# Altium PCB Integrate.PcbDoc
Units mil, origin at the board's own origin, x right, y up, seen from the top; angles counter-clockwise.
Board outline 2690 x 1650 mil, 2 copper layers (Top Layer, Bottom Layer); 41 components, 23 nets, 151 pads, 406 vias.
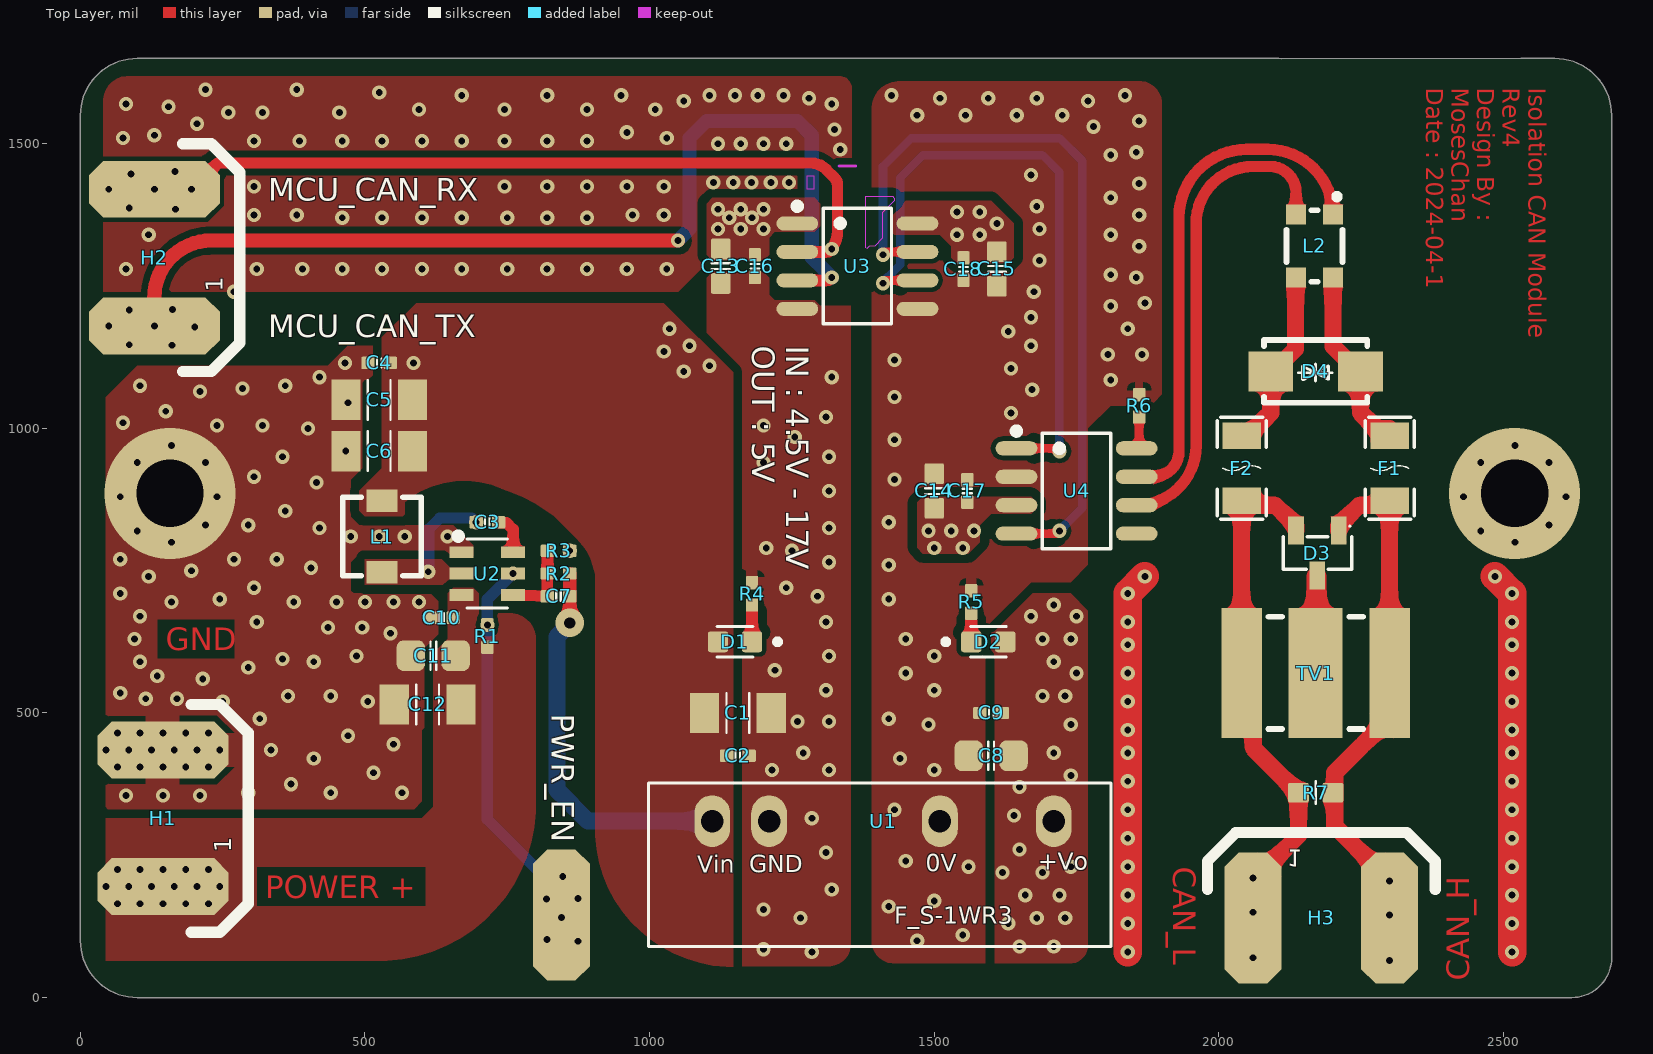
[diagram p0: Top Layer view]
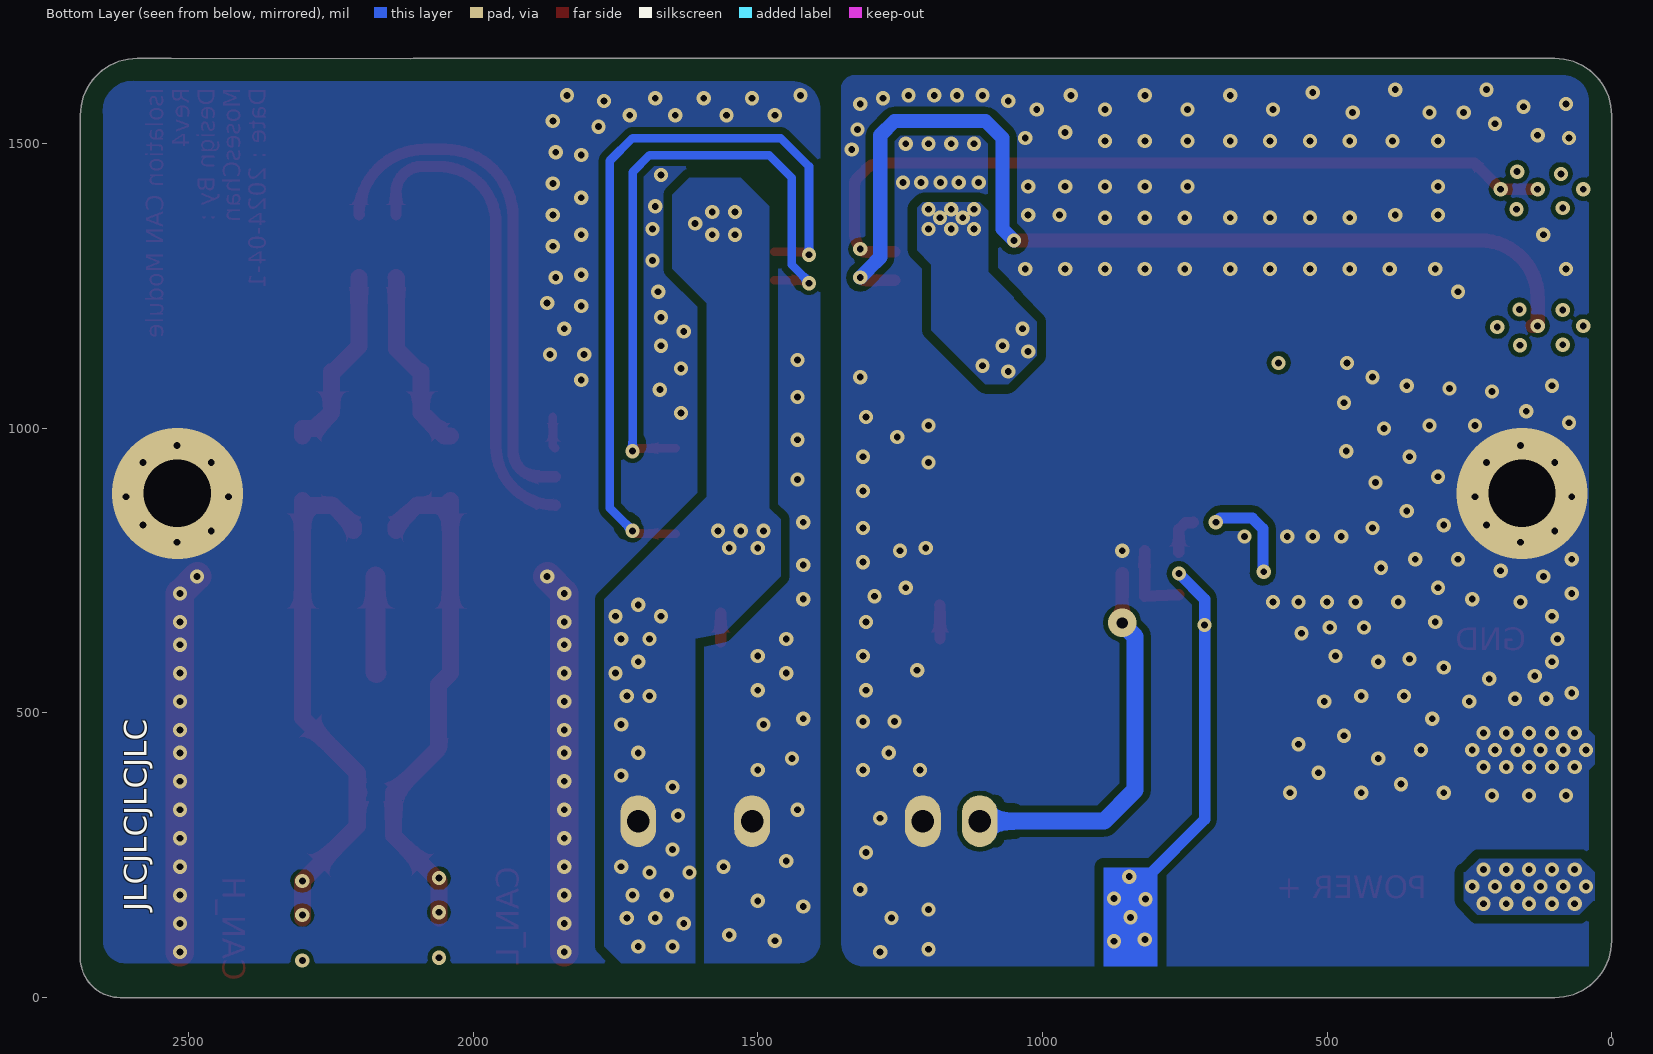
[diagram p1: Bottom Layer view, seen from below]
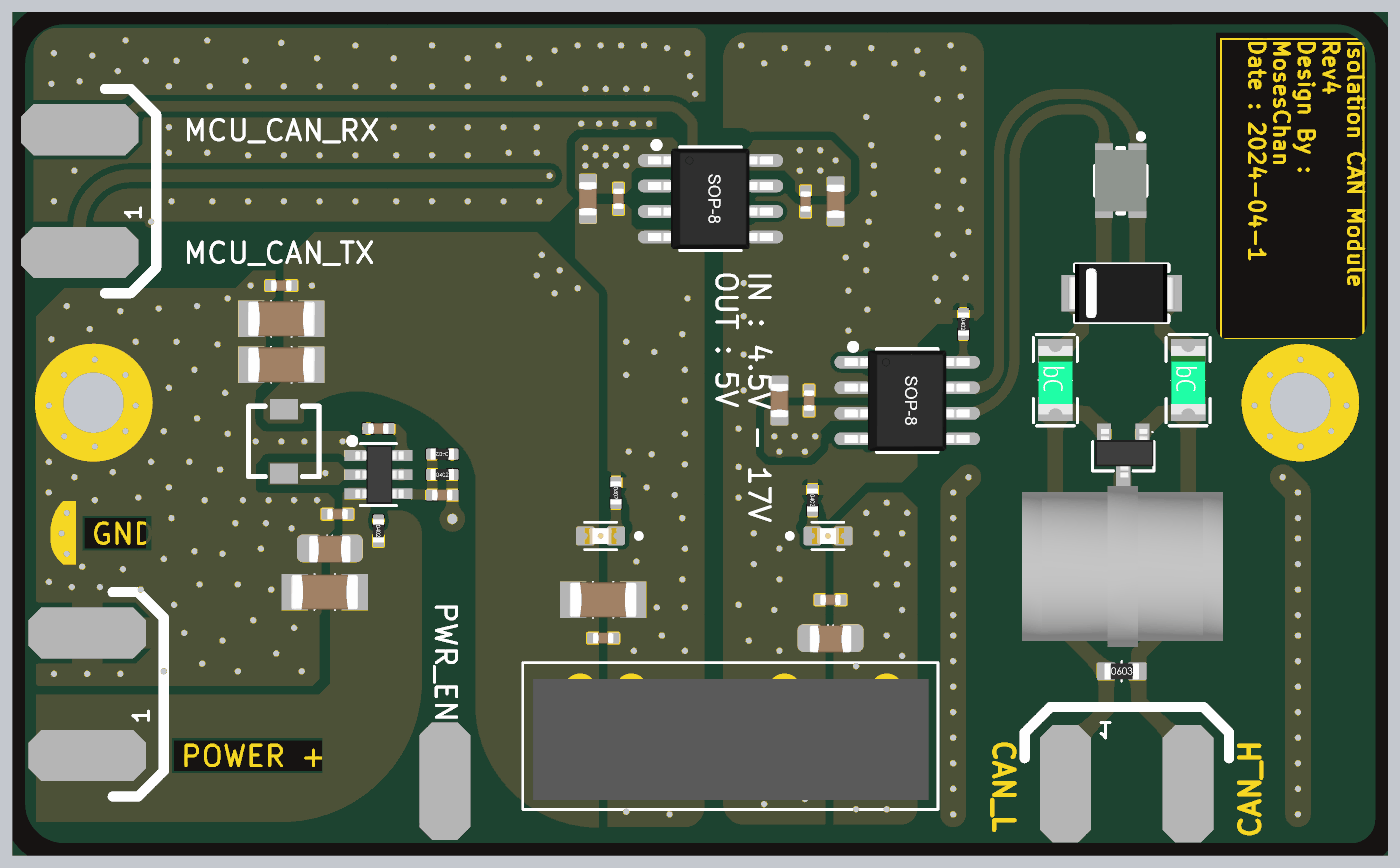
[diagram p2: 3D render of the assembled board from above, using the file's embedded part models]

## Layer stack, top to bottom
Top Solder: solder mask 0.4, Solder Resist, Dk 3.5
Top Layer: signal copper 1.4
Dielectric 1: dielectric 12.6, FR-4, Dk 4.8
Bottom Layer: signal copper 1.4
Bottom Solder: solder mask 0.4, Solder Resist, Dk 3.5

## Board outline
2620,0 ccw(c2620,70) 2690,70 2690,1550 ccw(c2590,1550) 2590,1650 2530,1650 2109.95,1649.5 ccw(c2100.02,1550.39) 2100,1650 100,1650 ccw(c100,1550) 0,1550 0,100 ccw(c100,100) 100,0

## Design rules (kind name [scope] priority, off if disabled: settings)
BoardOutlineClearance BoardOutlineClearance_1 [IsPad] p1: gap=0 ignorepadtopadclearanceinfootprint=FALSE
BoardOutlineClearance [All] p2: gap=10 ignorepadtopadclearanceinfootprint=FALSE
Clearance [All] p1: gap=8 ignorepadtopadclearanceinfootprint=FALSE except(5: SMDPad-SMDPad; 10: Arc-Via Arc-Hole Track-Via Track-Hole; 12: Arc-Fill Arc-Poly Arc-Region Track-Fill Track-Poly Track-Region; 13: Arc-THPad Track-THPad; 16: Fill-Fill Fill-Poly Fill-Region Poly-Poly Poly-Region Region-Region; 20: THPad-THPad)
ComponentClearance [All] p1: gap=0 collisioncheckmode=3 verticalgap=10 showdistances=TRUE
DiffPairsRouting [All] p1: maxlimit=10 minlimit=10 mostfreqgap=10 toplayer_minwidth=15 toplayer_maxwidth=15 toplayer_prefwidth=15 bottomlayer_minwidth=15 bottomlayer_maxwidth=15 bottomlayer_prefwidth=15 substack1={57F5FA3C-B000-454A-A462-912CA57F869F} toplayer_{57f5fa3c-b000-454a-a462-912ca57f869f}_minwidth=15 toplayer_{57f5fa3c-b000-454a-a462-912ca57f869f}_maxwidth=15 toplayer_{57f5fa3c-b000-454a-a462-912ca57f869f}_prefwidth=15 bottomlayer_{57f5fa3c-b000-454a-a462-912ca57f869f}_minwidth=15 bottomlayer_{57f5fa3c-b000-454a-a462-912ca57f869f}_maxwidth=15 bottomlayer_{57f5fa3c-b000-454a-a462-912ca57f869f}_prefwidth=15 maxuncoupledlength=500
Height [All] p1: minheight=0 maxheight=39330.71 prefheight=500
HoleSize [All] p1: absolutevalues=TRUE maxlimit=3897.64 minlimit=7.87 maxpercent=80.000 minpercent=20.000
HoleToHoleClearance [All] p1: gap=20 allowstackedmicrovias=TRUE
MinimumSolderMaskSliver [All] p1: minsoldermaskwidth=0
PlaneClearance [All] p1: clearance=7.87
PlaneConnect [All] p1: planeconnectstyle=Direct reliefexpansion=7.87 reliefentries=4 reliefconductorwidth=7.87 reliefairgap=7.87
PolygonConnect [All] p1: connectstyle=Direct reliefconductorwidth=10 reliefentries=4 polygonreliefangle="90 Angle" airgapwidth=10
RoutingVias [All] p1: holewidth=8 width=20 viastyle="Through Hole" minholewidth=8 minwidth=20 maxholewidth=1200 maxwidth=2400
SilkToSilkClearance [All] p1: silktosilkclearance=0.39
SilkToSolderMaskClearance [IsPad] p1: minsilkscreentomaskgap=0 clearancetoexposedcopper=TRUE
SolderMaskExpansion [All] p1: expansion=0.39 istentingtop=FALSE
Width [All] p1: maxlimit=3897.64 minlimit=8 preferedwidth=8 substack1={57F5FA3C-B000-454A-A462-912CA57F869F} minimp=50.000000 maximp=50.000000 favimp=50.000000
20 further rules are at their usual default settings.

## Components (designator, comment, footprint, x,y, rotation, side; value= is the part's Value field where it differs from the comment)
C1 "47uF" 1206_C 1155,500 r180 top
C2 "0.1uF" 0402_C 1155,425 r0 top
C3 "0.1uF" 0402_C 715,835 r0 top
C4 "4.7uF" 0402_C 525,1115 r0 top
C5 "47uF" 1206_C 525,1050 r0 top
C6 "47uF" 1206_C 525,960 r0 top
C7 "47nF" 0402_C 840,705 r0 top
C8 "22uF" 0805_C 1600,425 r180 top
C9 "0.1uF" 0402_C 1600,500 r0 top
C10 "0.1uF" 0402_C 635,667.5 r180 top
C11 "22uF" 0805_C 620,600.78 r180 top
C12 "47uF" 1206_C 610,515 r180 top
C13 "10uF" 0603_C 1125,1285 r90 top
C14 "10uF" 0603_C 1500,890 r270 top
C15 "10uF" 0603_C 1610,1280 r90 top
C16 "0.1uF" 0402_C 1185,1285 r90 top
C17 "0.1uF" 0402_C 1558.06,890 r270 top
C18 "0.1uF" 0402_C 1551.34,1279.68 r90 top
D1 "LED_RED" 0603_LED 1150,625 r180 top
D2 "LED_YELLOW" 0603_LED 1595,625 r0 top
D3 "SM712" SOT-23-3 2173,781 r90 top
D4 "Bi-TVS" SMA-BI 2170,1100 r0 top
F1 "JK 60V 0.1A" F1206 2300,930 r270 top
F2 "JK 60V 0.1A" F1206 2040.08,930 r270 top
H1 "Power Input" CONNECT_PAD 145,315 r90 top locked
H2 "CAN Input" CONNECT_PAD 130,1300 r90 top
H3 "CAN Output" CONNECT_PAD 2180,140 r0 top
L1 "3.3uH" IND-SMD_L3.5-W3.2 530,810 r270 top
L2 "PSCIAQ3225" FILTER-SMD_4P 2168.08,1320.44 r270 top
R1 "10K" 0402_R 715,635 r270 top
R2 "54.9K" 0402_R 840,745 r0 top
R3 "10K" 0402_R 840,785 r180 top
R4 "510R" 0402_R 1180,709.37 r270 top
R5 "510R" 0402_R 1565,695 r270 top
R6 "0R" 0402_R 1860,1039.68 r270 top
R7 "120R" 0603_R 2170,360 r0 top
TV1 "3RL090M-5-S (GDT)" DIO-DT-SMD 2170,570 r180 top
U1 "F0505S-1WR3" F_S-1WR3 1410,310 r0 top
U2 "TPS563201" SOT-23-6 715,745 r270 top
U3 "ADUM1201ARZ-RL7" SOP-8 1365,1285 r270 top
U4 "PCA82C251T" SOP-8 1750,890 r270 top

## Footprints (in the part's own frame and the unit in brackets; to place one, negate y for a bottom-side part, rotate by r counter-clockwise, add the part's x,y. Pads: shape width x height; smd on the part's side, far side on the other; paste and mask are expansions set on the pad)
0402_C [mm]
  rrect20% 0.6x0.55 smd mask+0.051: 1(-0.5,0) 2(0.5,0)
  silkscreen extent -0.1,-0.2 0.1,0.2, body extent -0.52,-0.27 0.53,0.28, height 0.52
0402_R [mm]
  rrect20% 0.6x0.55 smd mask+0.051: 1(-0.5,0) 2(0.5,0)
  body extent -0.58,-0.27 0.57,0.28, height 0.41
0603_C [mm]
  rrect20% 0.93x0.88 smd: 1(-0.77,0) 2(0.77,0)
  silkscreen extent -0.12,-0.4 0.13,0.4, body extent -0.85,-0.45 0.85,0.45, height 0.9
0603_LED [mm]
  rrect25% 0.91x0.93 smd: A(0.76,0) C(-0.76,0)
  silkscreen extent -2.02,-0.68 0.8,0.68, body extent -0.8,-0.4 0.8,0.4, height 0.55
0603_R [mm]
  rrect20% 0.93x0.88 smd: 1(-0.77,0) 2(0.77,0)
  silkscreen extent 0,-0.51 0,0.51, body extent -0.85,-0.4 0.85,0.4, height 0.56
0805_C [mil]
  rrect50% 50x54 smd: 1(-39.37,0) 2(39.37,0)
  silkscreen extent -5,-25 5,25, body extent -41,-25 41,28, height 37
1206_C [mm]
  rect 1.3x1.8 smd: 1(-1.49,0) 2(1.49,0)
  silkscreen extent -0.51,-0.89 0.51,0.89, body extent -1.67,-0.87 1.68,0.88, height 1.4
CONNECT_PAD [mil]
  oct 100x230 smd mask+0.39: 1(-120,0) 2(120,0)
  oct 100x230 on Top Solder: 1(-120,0) 2(120,0)
  silkscreen extent -200,-150 200,-50
DIO-DT-SMD [mm]
  rect 1.8x5.8 smd mask+0.01: 1(-3.3,0) 3(3.3,0)
  rect 1.8x5.8 on Top Solder: 1(-3.3,0) 3(3.3,0)
  rect 2.4x5.8 smd mask+0.01: 2(0,0)
  rect 2.4x5.8 on Top Solder: 2(0,0)
  silkscreen extent -2.13,-2.51 2.11,2.49, body extent -5.05,-3.87 4.95,4.13, height 8.06
F1206 [mm]
  rect 1.19x1.728 smd mask+0.01: 1(-1.445,0) 2(1.445,0)
  rect 1.19x1.728 on Top Solder: 1(-1.445,0) 2(1.445,0)
  silkscreen extent -2.27,-1.09 2.27,1.09, body extent -1.7,-0.84 1.7,0.86, height 0.71
F_S-1WR3 [mm]
  oval 1.6x2.3 hole 1: 1(-7.62,0) 2(-5.08,0) 5(2.54,0) 7(7.62,0)
  silkscreen extent -10.47,-5.6 10.17,1.7, body extent -9.95,-5.12 9.7,0.88, height 10.16
FILTER-SMD_4P [mm]
  rect 0.9x0.9 smd mask+0.01: 1(-1.4,0.825) 2(-1.4,-0.825) 3(1.4,-0.825) 4(1.4,0.825)
  rect 0.9x0.9 on Top Solder: 1(-1.4,0.825) 2(-1.4,-0.825) 3(1.4,-0.825) 4(1.4,0.825)
  silkscreen extent -2.33,-1.25 1.6,1.25, body extent -1.52,-1.27 1.52,1.27, height 2.74
IND-SMD_L3.5-W3.2 [mm]
  rect 1x1.4 smd mask+0.01: 1(-1.6,0) 2(1.6,0)
  rect 1x1.4 on Top Solder: 1(-1.6,0) 2(1.6,0)
  silkscreen extent -1.75,-1.75 1.75,1.75
SMA-BI [mm]
  rect 2x1.8 smd mask+0.01: 1(-2,0) 2(2,0)
  rect 2x1.8 on Top Solder: 1(-1.968,0) 2(2,0)
  silkscreen extent -2.3,-1.4 2.3,1.4, body extent -2.67,-1.46 2.61,1.46, height 2.41
SOP-8 [mm]
  oval 0.63x1.865 smd mask+0.01: 1(-1.905,-2.682) 2(-0.635,-2.682) 3(0.635,-2.682) 4(1.905,-2.682) 5(1.905,2.682) 6(0.635,2.682) 7(-0.635,2.682) 8(-1.905,2.682)
  oval 0.63x1.865 on Top Solder: 1(-1.905,-2.682) 2(-0.635,-2.682) 3(0.635,-2.682) 4(1.905,-2.682) 5(1.905,2.682) 6(0.635,2.682) 7(-0.635,2.682) 8(-1.905,2.682)
  silkscreen extent -2.82,-2.83 2.58,1.52, body extent -2.5,-3.11 2.5,3.11, height 1.87
SOT-23-3 [mm]
  rect 1.25x0.7 on Top Solder: 1(0.991,-0.94) 2(0.991,0.94) 3(-1.016,0)
  rect 1.25x0.7 smd mask+0.01: 1(1,-0.95) 2(1,0.95) 3(-1,0)
  silkscreen extent -0.73,-1.53 1.26,1.53, body extent -1.05,-1.5 1.35,1.4, height 1
SOT-23-6 [mil]
  rect 20.95x42.2 smd mask+0.39: 1(-37.4,-45.24) 2(0,-45.24) 3(37.4,-45.24) 4(37.4,45.24) 5(0,45.24) 6(-37.4,45.24)
  rect 20.95x42.2 on Top Solder: 1(-37,-46) 2(0.4,-46) 3(38,-45) 4(37.8,45) 5(0.4,45) 6(-37,45)
  silkscreen extent -72,-57 61,35, body extent -57,-45 57,49, height 39

## Part data
C1 C5 C6 C12: library part C1206, "SMT Capacitor"
C2 C3 C4 C7 C9 C10 C16 C17 C18: library part C0402, "SMT Capacitor"
C8 C11: library part C0805, "SMT Capacitor"
C13 C14 C15: library part C0603, "SMT Capacitor"
D1 D2: library part LED_0603, "CHIP LED WHITE 0603 TOP VIEW", Package=None, Availability=Unavailable, MP=LTW-C191TLA, Price=None
D3: "Dual channel ESD discharger", JLCPCB Part Class="Extended Part", Manufacturer="TECH PUBLIC(??)", Add into BOM=yes, Convert to PCB=yes, Datasheet=https://atta.szlcsc.com/upload/public/pdf/source/20210810/E76C7C1824B0CB2A5B8963B3ABCE2DCE.pdf, Device=SM712_C521963, LCSC Part Name=SM712, Manufacturer Part=SM712, Name=SM712, Supplier=LCSC, Supplier Footprint=SOT-23, Supplier Part=C521963, Symbol=SM712_C521963
D4: library part SMAJ13CA, "Bidirectional TVS", Breakdown Voltage=14.4V, JLCPCB Part Class="Extended Part", LCSC Part Name="?? Vrwm:13V", Manufacturer=Slkor(???), Maximum Clamping Voltage=21.5V, Peak Pulse Current (Ipp)@10/1000µs=18.6A, Reverse Stand-Off Voltage (Vrwm)=13V, Add into BOM=yes, Convert to PCB=yes, Datasheet=https://atta.szlcsc.com/upload/public/pdf/source/20200414/C513473_E63E0FD439519C3FF443B186760FCA0C.pdf, Device=SMAJ13CA_C513473, Manufacturer Part=SMAJ13CA, Name=SMAJ13CA, polarity=??, Supplier=LCSC, Supplier Footprint=SMA, Supplier Part=C513473, Symbol=SMAJ13CA_C513473
F1 F2: library part JK-nSMD010/60V, "Resettable Fuse", JLCPCB Part Class="Extended Part", LCSC Part Name="100mA 60V", Manufacturer=JK(??), Add into BOM=yes, Convert to PCB=yes, Datasheet=https://atta.szlcsc.com/upload/public/pdf/source/20210427/C2830251_B9511B640A50AD6A91174E2DDDD254CA.pdf, Device=JK-nSMD010/60V, Manufacturer Part=JK-nSMD010/60V, Name=JK-nSMD010/60V, Supplier=LCSC, Supplier Footprint=SMD1206, Supplier Part=C2830236, Symbol=JK-NSMD010/60V
H1 H2 H3: library part Connector-2, "Two pin connector."
L1: library part TMPC0302H-3R3MG, "SMD power inductor 3.3uH", DC Resistance (DCR)=125mO, JLCPCB Part Class="Extended Part", LCSC Part Name="3.3uH ±20% 3A 125mO", Manufacturer=TAI-TECH(??), Rated Current=3A, Tolerance=±20%, Add into BOM=yes, Convert to PCB=yes, Datasheet=https://atta.szlcsc.com/upload/public/pdf/source/20200917/C305200_025B938FDDD8216CB9AF20170083C431.pdf, Device=TMPC0302H-3R3MG, Manufacturer Part=TMPC0302H-3R3MG, Name=3.3uH, Supplier=LCSC, Supplier Footprint=SMD, Supplier Part=C305200, Symbol=TMPC0302H-3R3MG
L2: library part PSCIAQ3225-101Z, "Common mode choke - 5.1KOhm @ 10Mhz", Current rating=150mA, DC Resistance (DCR)=1.5O, Impedance @ Frequency=5.1kO@10MHz, Inductance @ Frequency=100uH@100kHz, JLCPCB Part Class="Extended Part", LCSC Part Name="?? 1210????? ??5.1kO@10MHz", Manufacturer=PROD(???), Operating Temperature=-25?~+105?, Voltage Rating=80VAC, Voltage Rating - DC=80V, Add into BOM=yes, Convert to PCB=yes, Datasheet=https://atta.szlcsc.com/upload/public/pdf/source/20221209/0F115E7BC87283E32C2A7BCB65AC9CDC.pdf, Device=PSCIAQ3225-101Z, Manufacturer Part=PSCIAQ3225-101Z, Name=PSCIAQ3225-101Z, Number of Lines=2, Supplier=LCSC, Supplier Footprint=1210, Supplier Part=C3011568, Symbol=PSCIAQ3225-101Z, Withstanding Voltage=80V
R1 R2 R3 R4 R5 R6: library part R0402, "SMT Resistor"
R7: library part R0603, "SMT Resistor"
TV1: library part 3RL090M-5-S, "Gas Discharge Tube", DC Spark-over Voltage=90V, JLCPCB Part Class="Extended Part", LCSC Part Name="90V 5kA 3???GDT", Manufacturer=Brightking(????), Maximum Capacitance @ 1MHz=2pF, Nominal Impulse Discharge Current=5kA, Tolerance=±20%, Add into BOM=yes, Convert to PCB=yes, Datasheet=https://atta.szlcsc.com/upload/public/pdf/source/20160709/1468031850741.pdf, Device=3RL090M-5-S, Manufacturer Part=3RL090M-5-S, Name=3RL090M-5-S, Number of Poles=3, Supplier=LCSC, Supplier Footprint=SMD,5x6.6mm, Supplier Part=C78322, Symbol=3RL090M-5-S
U1: "MORNSUN Isolation Power supply"
U2: "DCDC In 4.5V~17V Out 768mV~7V 3A", Input Voltage=4.5V~17V, JLCPCB Part Class="Extended Part", LCSC Part Name="??? Vin=4.5V~17V Vout=768mV~7V 3A", Manufacturer=TI(????), Manufacturer Part=TPS563201DDCR, Operating Temperature=-40?~+125?@(TJ), Output Current (Max)=3A, Output Voltage=768mV~7V, Switching Frequency=580kHz, Add into BOM=yes, Convert to PCB=yes, Datasheet=https://atta.szlcsc.com/upload/public/pdf/source/20170707/1499421477081.pdf, Device=TPS563201DDCR, Function=???, Name=TPS563201DDCR, Number of Outputs=1, Output Type=??, Supplier=LCSC, Supplier Footprint=SOT-23-Thin-6, Supplier Part=C116592, Symbol=TPS563201DDCR, Synchronous Rectification=?, Topology=???
U3: library part ADUM1201ARZ, "Digital Isolator", Isolation voltage=2500Vrms, JLCPCB Part Class="Basic Part", Manufacturer=ADI(???)/LINEAR(??), Operating Temperature=-55?~+100?, Supply Voltage=2.7V~5.5V, Voltage Isolation or Not=?????, Add into BOM=yes, Applications=??, Convert to PCB=yes, Data Rate=1Mbps, Datasheet=https://atta.szlcsc.com/upload/public/pdf/source/20121103/1457706544769.pdf, Device=ADUM1201ARZ-RL7, Forward Channel=1, Isolation Technology=???, LCSC Part Name=ADUM1201ARZ-RL7, Manufacturer Part=ADUM1201ARZ-RL7, Name=ADUM1201ARZ-RL7, number of channels=2, Reverse channel=1, Supplier=LCSC, Supplier Footprint=SOIC-8, Supplier Part=C9669, Symbol=ADUM1201ARZ-RL7
U4: library part PCA82C251, "CAN transceiver", Manufacturer=Tokmas(????), Add into BOM=yes, Convert to PCB=yes, Datasheet=https://atta.szlcsc.com/upload/public/pdf/source/20230625/276DDB82A8AA19CE4785C79DB2491288.pdf, Device=PCA82C251T, LCSC Part Name=PCA82C251T, link=https://atta.szlcsc.com/upload/public/pdf/source/20230621/1484E0AD24B83654AF18D5B601DFC963.pdf, Manufacturer Part=PCA82C251T, Name=PCA82C251T, Supplier=LCSC, Supplier Footprint=SOP-8, Supplier Part=C7432796, Symbol=PCA82C251T

## Free pads (board coordinates)
  oct 100x230 smd: 11(845,145)

## Via types
v1: diameter 25, hole 12, Top Layer to Bottom Layer, tented both sides, 304 vias
v2: diameter 25, hole 12, Top Layer to Bottom Layer, tented bottom, 53 vias
v3: diameter 25, hole 12, Top Layer to Bottom Layer, 46 vias
v4: diameter 230, hole 118.11, Top Layer to Bottom Layer, 2 vias
v5: diameter 50, hole 20, Top Layer to Bottom Layer, tented top, 1 vias

## Nets (pads, with @x,y where several pads share a name; then routed paths per layer and width w, separated by ;. In a path a pad name is that pad's centre, name@x,y a point inside that pad or via, vN(x,y) a via of type N, cw(c..) or ccw(c..) an arc to the next point about the centre after c; other vN are vias at no path point)
BS: C3.2 U2.6@760.24,782.4 | length 70.8
  Top Layer w20: C3.2 735.51,834.17 748.52,834.17 760.24,822.46 U2.6@760.24,782.4
CAN_GND: C8.2 C9.1 C14.1 C15.1 C17.1 C18.1 R5.1 R6.1 U1.5 U3.5@1470.61,1210 U4.2@1644.39,915 | length 1344.9
  Top Layer w50: v1(1840,80) v2(1840,710) v1(1870,740) ; v1(2485,740) v2(2515,710) v1(2515,80)
  other v1: 1470,100 1550,110 1420,160 1500,170 1840,180 2515,180 1560,230 1450,240 1840,280 2515,280 1430,330 1840,380 2515,380 1500,400 1440,420 1840,470 2515,470 1490,480 1420,490 1500,540 1450,570 1840,570 2515,570 1450,630 1840,660 2515,660 1420,700 1420,760 1420,835 1430,910 1430,980 1635,1027 1430,1055 1672,1068 1635,1105 1430,1120 1805,1130 1865,1130 1670,1145 1630,1170 1840,1175 1670,1195 1810,1215 1870,1220 1675,1240 1855,1265 1810,1270 1685,1295 1860,1320 1810,1340 1685,1350 1860,1375 1680,1390 1810,1405 1860,1430 1670,1445 1810,1480 1855,1485 1780,1530 1860,1540 1470,1550 1555,1550 1645,1550 1725,1550 1770,1575 1510,1580 1595,1580 1680,1580 1425,1585 1835,1585
  other v2: 1840,130 2515,130 1840,230 2515,230 1840,330 2515,330 1840,430 2515,430 1840,520 2515,520 1500,600 1840,620 2515,620 1810,1085
  other v3: 2520,800 2460,820 2580,830 2430,880 2610,880 2460,940 2580,940 2520,970
  other v4: 2519.69,885.83
EN: pad.11 R1.1 U2.5@760.24,745 | length 624.9
  Bottom Layer w20: v1(760.24,745) 715,699.76 v1(715,654.68) 715,313 815.5,212.5 v1(847.5,212.5)
  other v1: 874,99 820,102 845,141 819,173 874,174
EXT_CAN_H: D3.1@2210.4,820.37 F1.2@2300,873.11 H3.2@2300,140 R7.2 TV1.1@2299.92,570 | length 932.1
  Top Layer w30: R7.2 R7.2@2201.3,360 ; D3.1@2210.4,820.37 2210.4,828.76 2246.33,864.68 2291.57,864.68 2299.96,873.07 2299.96,570.04 2299.92,570 2299.92,491.26 2203.62,394.96 2203.62,362.32 R7.2@2201.3,360 ; H3.2@2300,140 v2(2300,205) 2203.62,301.38 2203.62,357.68 R7.2@2201.3,360
  other v2: 2300,65 2300,145
EXT_CAN_L: D3.2@2135.6,820.37 F2.2@2040.08,873.11 H3.1@2060,140 R7.1 TV1.3@2040.08,570 | length 930.5
  Top Layer w30: H3.1@2060,140 2060,205 2140,285 2140,359.69 R7.1 2138.7,360 2060.51,438.19 2060.51,549.57 2040.08,570 2040.08,873.11 2048.51,864.68 2099.67,864.68 2135.6,828.76 D3.2@2135.6,820.37
  other v2: 2060,70 2060,150 2060,210
FB: C7.1 R2.1 R3.2 U2.4@760.24,707.6 | length 140.1
  Top Layer w20: U2.4@760.24,707.6 C7.1 R2.1 R3.2
GND: C1.1 C2.2 C4.1 C5.1 C6.1 C10.2 C11.2 C12.2 C13.1 C16.1 H1.2@145,435 R3.1 R4.1 U1.2 U2.1@669.76,782.4 U3.4@1259.39,1210
  other v1: 1285,80 1200,85 1265,140 1200,155 1320,190 1310,255 1285,315 80,355 145,355 210,355 295,360 440,360 565,360 370,375 515,395 1215,400 1315,400 410,420 1270,430 335,435 550,445 470,460 1260,485 1315,485 315,490 250,520 505,520 115,525 170,525 365,530 440,530 70,535 1310,540 215,560 135,565 1220,575 295,580 105,590 410,590 355,595 485,600 1315,600 95,630 545,640 435,650 495,650 310,660 1310,660 105,670 160,695 375,695 450,695 500,695 550,695 595,695 245,700 1295,705 70,710 305,720 1240,720 120,740 195,750 405,755 1315,765 70,770 270,770 345,770 859.69,785 1250,785 1205,790 475,810 525,810 570,810 645,810 420,825 1315,825 295,830 360,855 1315,890 415,905 305,915 1200,940 355,950 1315,950 466.34,960 1255,985 400,1000 240,1005 320,1005 1200,1005 75,1010 1310,1020 150,1030 470,1045 210,1065 285,1070 105,1075 360,1075 420,1090 1320,1090 270,1240 80,1280 310,1280 390,1280 460,1280 530,1280 600,1280 670,1280 750,1280 820,1280 890,1280 960,1280 1030,1280 120,1340 460,1370 530,1370 600,1370 670,1370 750,1370 820,1370 890,1370 305,1375 380,1375 970,1375 1025,1375 305,1425 745,1425 820,1425 890,1425 960,1425 1025,1425 1112,1432 1147,1432 1179,1432 1213,1432 1245,1432 1335,1490 1120,1500 1160,1500 1200,1500 1240,1500 305,1505 385,1505 460,1505 530,1505 600,1505 670,1505 745,1505 820,1505 890,1505 75,1510 1030,1510 130,1515 960,1520 1325,1525 205,1535 260,1555 320,1555 455,1555 595,1560 745,1560 890,1560 1010,1560 155,1565 80,1570 1320,1570 1060,1575 1280,1580 670,1585 820,1585 950,1585 1105,1585 1150,1585 1190,1585 1235,1585 525,1590 220,1595 380,1595
  other v2: 160,800 100,820 220,830 70,880 240,880 100,940 220,940 160,970 465,1115
  other v3: 65,405 105,405 145,405 185,405 225,405 45,435 85,435 125,435 165,435 205,435 245,435 65,465 105,465 145,465 185,465 225,465
  other v4: 157.48,885.83
INNER_CAN_H: L2.1@2200.56,1375.56 U4.7@1855.61,915 | length 915.7
  Top Layer w20: U4.7@1855.61,915 1885,915 ccw(c1885,960) 1930,960 1930,1371.01 cw(c2048.99,1371.01) 2048.99,1490 2086.12,1490 cw(c2086.12,1375.56) 2200.56,1375.56 L2.1@2200,1376.12
INNER_CAN_L: L2.2@2135.6,1375.56 U4.6@1855.61,865 | length 852.1
  Top Layer w20: U4.6@1855.61,865 ccw(c1855.61,969.39) 1960,969.39 1960,1360 cw(c2060,1360) 2060,1460 2090,1460 cw(c2090,1414.4) 2135.6,1414.4 L2.2@2135.6,1375.56
ISO_VCC_5V: C8.1 C9.2 C14.2 C15.2 C17.2 C18.2 D2.A U1.7 U3.8@1470.61,1360 U4.3@1644.39,865
  other v1: 1650,90 1710,90 1630,130 1680,140 1730,140 1660,180 1720,180 1620,220 1690,220 1740,230 1650,260 1640,320 1650,370 1740,390 1710,430 1740,480 1690,530 1730,530 1750,570 1670,670 1750,670 1710,690 1550,790 1490,820 1530,820 1570,820 1540,1340 1580,1340 1610,1360 1540,1380
  other v2: 1710,590 1690,630 1740,630 1500,790 1580,1380
MCU_CAN_RX: H2.2@130,1420 U3.2@1259.39,1310 | length 1414.3
  Top Layer w20: v2(130,1420) v2(195,1420) 241.12,1466.12 1283.15,1466.12 cw(c1283.15,1428.15) 1310,1455 1325.37,1439.63 cw(c1314.19,1428.45) 1330,1428.45 1330,1346.21 cw(c1278.79,1346.21) 1315,1310 U3.2@1259.39,1310
  other v2: 167,1385 86,1387 50,1420 89,1447 166,1451
  other v3: 1320,1315
MCU_CAN_TX: H2.1@130,1180 U3.3@1259.39,1260 | length 1790.3
  Top Layer w20: U3.3@1259.39,1260 1315,1260 v3(1320,1265)
  Top Layer w25: H2.1@140,1180 v2(130,1180) 130,1230 cw(c230,1230) 230,1330 v1(1050,1330)
  Bottom Layer w25: v1(1050,1330) 1070,1350 1070,1510 1100,1540 1260,1540 1285,1515 1285,1300.5 1305.5,1280 1305.5,1279.5 v3(1320,1265)
  other v2: 161,1146 86,1147 201,1178 50,1180 86,1208 162,1209
NetD1_C: D1.C R4.2 | length 59.7
  Top Layer w20: D1.C@1179.92,630 1179.92,689.61 R4.2
NetD2_C: D2.C R5.2 | length 50.3
  Top Layer w20: R5.2 1565.08,675.24 D2.C
NetD3_3: D3.3@2173,741.63 TV1.2@2170,570 | length 170.8
  Top Layer w35: TV1.2@2170,570 2171.5,571.5 D3.3@2171.5,740.13
NetD4_1: D4.1@2091.26,1100 F2.1@2040.08,986.89 L2.3@2135.6,1265.32 | length 326.5
  Top Layer w30: F2.1@2040.08,986.89 2050.67,986.89 2091.26,1027.48 2091.26,1100 2095.2,1100 2134.8,1139.61 2134.8,1264.52 L2.3@2135.6,1265.32
NetD4_2: D4.2@2248.74,1100 F1.1@2300,986.89 L2.4@2200.56,1265.32 | length 335.8
  Top Layer w30: L2.4@2200.56,1265.32 2200.56,1144.24 2244.8,1100 2248.74,1100 2248.74,1027.56 2276.3,1000 2300,1000 F1.1@2300,986.89
NetR6_2: R6.2 U4.8@1855.61,965 | length 56.8
  Top Layer w15: U4.8@1855.61,965 1860,969.39 R6.2
NetU3_6: U3.6@1470.61,1260 U4.1@1644.39,965 | length 1136.8
  Top Layer w15: v3(1410,1255) 1415,1260 U3.6@1470.61,1260 ; U4.1@1644.39,965 1715,965 v3(1720,960)
  Bottom Layer w15: v3(1410,1255) 1410,1257.07 1440,1287.07 1440,1440 1480,1480 1690,1480 1720,1450 v3(1720,960)
NetU3_7: U3.7@1470.61,1310 U4.4@1644.39,815 | length 1349.2
  Top Layer w15: v3(1410,1305) 1415,1310 U3.7@1470.61,1310 ; U4.4@1644.39,815 1715,815 v3(1720,820)
  Bottom Layer w15: v3(1410,1305) 1410,1460 1460,1510 1720,1510 1760,1470 1760,860 v3(1720,820)
SW: C3.1 L1.2@530,747.01 U2.2@669.76,745 | length 171.5
  Bottom Layer w20: v1@613,746 612.5,746.5 612.5,823.46 631.54,842.5 687.82,842.5 v1(695.32,835)
  other v1: 611.24,748
VCC_5V: C1.2 C2.1 C4.2 C5.2 C6.2 C7.2 C13.2 C16.2 D1.A L1.1@530,872.99 R2.2 U1.1 U3.1@1259.39,1360 | length 687
  Top Layer w23: R2.2 C7.2 859.84,704.84 v5(859.84,658.16)
  Bottom Layer w30: v5@862,659 837,634 837,365 892,310 U1.1
  other v1: 1060,1100 1105,1110 1025,1135 1035,1175 1120,1350 1160,1350 1200,1350 1180,1370 1120,1385 1160,1385 1200,1385
  other v2: 585,1115 1070,1145 1140,1370
Vin: C10.1 C11.1 C12.1 H1.1@145,195 R1.2 U2.3@669.76,707.6
  other v3: 65,165 105,165 145,165 185,165 225,165 45,195 85,195 125,195 165,195 205,195 245,195 65,225 105,225 145,225 185,225 225,225
pads on no net: D3.1@2210,820 D3.2@2136,820 D3.3@2173,741 D4.1@2092.52,1100 D4.2@2248.74,1100 F1.1@2300,986.89 F1.2@2300,873.11 F2.1@2040.08,986.89 F2.2@2040.08,873.11 H1.1@145,195 H1.2@145,435 H2.1@130,1180 H2.2@130,1420 H3.1@2060,140 H3.2@2300,140 L1.1@530,872.99 L1.2@530,747.01 L2.1@2200.56,1375.56 L2.2@2135.6,1375.56 L2.3@2135.6,1265.32 L2.4@2200.56,1265.32 TV1.1@2299.92,570 TV1.2@2170,570 TV1.3@2040.08,570 U2.1@669,782 U2.2@669,744.6 U2.3@670,707 U2.4@760,707.2 U2.5@760,744.6 U2.6@760,782 U3.1@1259.39,1360 U3.2@1259.39,1310 U3.3@1259.39,1260 U3.4@1259.39,1210 U3.5@1470.61,1210 U3.6@1470.61,1260 U3.7@1470.61,1310 U3.8@1470.61,1360 U4.1@1644.39,965 U4.2@1644.39,915 U4.3@1644.39,865 U4.4@1644.39,815 U4.5 U4.6@1855.61,865 U4.7@1855.61,915 U4.8@1855.61,965

## Polygon pours and split planes (outlines as drawn)
GND on Top Layer "Top Layer-GND" (solid, pour order 96): 40,1574 cw(c85,1574) 85,1619 1332,1619 cw(c1332,1596) 1355,1596 1355,1435 cw(c1325,1435) 1325,1405 1110,1405 1100,1395 1100,1290 1050,1240 40,1240
GND on Top Layer "Top Layer-GND 1" (solid, pour order 94): 1100,1165 1155,1110 1155,55 1314,55 ccw(c1314,94) 1353,94 1353,1215 1300,1215 1290,1225 1220,1225 1210,1235 1210,1265 1200,1275 1110,1275 1100,1265
GND on Top Layer "Top Layer-GND 3" (solid, pour order 92): 45,1055 100,1110 435,1110 470,1145 515,1145 515,1095 505,1085 500,1085 495,1080 495,930 475,910 475,845 490,830 655,830 675,810 690,795 690,775 485,775 475,765 475,715 480,710 615,710 635,690 635,645 605,615 605,475 600,470 600,345 580,325 45,325 40,330 45,335
VCC_5V on Top Layer "Top Layer-VCC_5V" (solid, pour order 90): 499.73,845.34 489.73,855.34 489.73,890.34 529.73,930.34 529.73,1159.73 590,1220 1025.07,1220 1146.73,1098.34 1146.73,54 cw(c1146.73,296) 904.73,296 904.73,743.74 896.74,769.81 ccw(c799.2,729.31) 872.79,805.05 832.51,845.34 ccw(c637.58,587.86) 739.56,894.28 cw(c841.89,1150.28) 733,897 ccw(c673.95,745.38) 569.73,870.34 569.73,845.34
SW on Top Layer "Top Layer-SW" (solid, pour order 88): 500,770 500,725 640,725 650,735 690,735 690,755 650,755 635,770
Vin on Top Layer "Top Layer-Vin" (solid, pour order 84): 45,315 340,315 600,315 620,335 620,605 645,630 645,710 655,720 690,720 700,710 700,675 755,675 cw(c755,630) 800,630 800,339.56 cw(c525.45,339.55) 525.44,65 45,65
ISO_VCC_5V on Top Layer "Top Layer-ISO_VCC_5V" (solid, pour order 56): 1600,60 1740,60 ccw(c1737.5,92.5) 1770,90 1770,680 1740,710 1670,710 1600,640
CAN_GND on Top Layer "Top Layer-CAN_GND" (solid, pour order 54): 1390,100 ccw(c1430,100) 1430,60 1590,60 1590,650 1670,730 1740,730 1770,760 1770,1000 1810,1040 1880,1040 1900,1060 1900,1570 ccw(c1860,1570) 1860,1610 1440,1610 ccw(c1440,1560) 1390,1560
ISO_VCC_5V on Top Layer "Top Layer-ISO_VCC_5V 1" (solid, pour order 52): 1470,870 1480,880 1670,880 1680,870 1680,860 1670,850 1600,850 1580,830 1580,800 1560,780 1480,780 1470,790
CAN_GND on Top Layer "Top Layer-CAN_GND 1" (solid, pour order 50): 1470,910 1480,900 1670,900 1680,910 1680,920 1670,930 1600,930 1580,950 1580,980 1560,1000 1480,1000 1470,990
CAN_GND on Top Layer "Top Layer-CAN_GND 2" (solid, pour order 42): 1418.81,1212.63 1428.81,1222.63 1508.81,1222.63 1528.81,1242.63 1528.81,1262.63 1538.81,1272.63 1628.81,1272.63 1638.81,1262.63 1638.81,1202.63 1598.81,1162.63 1448.81,1162.63 1418.81,1192.63
ISO_VCC_5V on Top Layer "Top Layer-ISO_VCC_5V 2" (solid, pour order 40): 1420,1350 1430,1340 1510,1340 1530,1320 1530,1300 1540,1290 1630,1290 1640,1300 1640,1360 1600,1400 1450,1400 1420,1370
GND on Top Layer "Top Layer-GND 2" (solid, pour order 2): 1290,1165 1300,1175 1300,1215 1290,1225 1220,1225 1210,1235 1210,1265 1200,1275 1110,1275 1100,1265 1100,1175 1110,1165
VCC_5V on Top Layer "Top Layer-VCC_5V 2" (solid, pour order 0): 1290,1405 1300,1395 1300,1355 1290,1345 1220,1345 1210,1335 1210,1305 1200,1295 1110,1295 1100,1305 1100,1395 1110,1405
GND on Bottom Layer "Bottom Layer-GND" (solid, pour order 112): 40,1575 cw(c85,1575) 85,1620 1330,1620 cw(c1330,1597) 1353,1597 1353,93 cw(c1313.84,94.16) 1315,55 1305,55 40,55
Vin on Bottom Layer "Bottom Layer-Vin" (solid, pour order 108): 30,220 54.31,244.31 233,244.31 257.31,220 260,220 260,170 235.69,145.69 57,145.69 32.69,170 30,170
GND on Bottom Layer "Bottom Layer-GND 1" (solid, pour order 106): 30,460 55,485 235,485 260,460 260,410 235,385 55,385 30,410
VCC_5V on Bottom Layer "Bottom Layer-VCC_5V" (solid, pour order 102): 1050,1227.5 1010,1187.5 1010,1127.5 1060,1077.5 1100,1077.5 1195,1172.5 1195,1287.5 1220,1312.5 1220,1387.5 1210,1397.5 1110,1397.5 1095,1382.5 1095,1275 1050,1230
CAN_GND on Bottom Layer "Bottom Layer-CAN_GND" (solid, pour order 60): 1390,100 ccw(c1430,100) 1430,60 2610,60 ccw(c2610,100) 2650,100 2650,1550 ccw(c2597.5,1557.5) 2590,1610 1440,1610 ccw(c1440,1560) 1390,1560
ISO_VCC_5V on Bottom Layer "Bottom Layer-ISO_VCC_5V" (solid, pour order 58): 1610,60 1740,60 1770,90 1770,700 1590,880 1590,1220 1650,1280 1650,1410 1620,1440 1530,1440 1480,1390 1480,860 1460,840 1460,740 1560,640 1610,630
no net on Top Solder (solid): 2355,1035 2355,1610 2610,1610 cw(c2592.5,1552.5) 2650,1570 2650,1045 cw(c2617.5,1042.5) 2615,1010 2380,1010 cw(c2380,1035)
no net on Top Solder (solid): 315,225 315,165 605,165 605,225
no net on Top Solder (solid): 140,660 140,600 260,600 260,660
no net on Top Solder (solid): 98.36,693.7 ccw(c158.72,633.35) 73.36,633.35 73.36,618.7 ccw(c133.72,618.7) 91.04,576.03 98.36,568.7 123.36,568.7 123.36,693.7

## Keep-outs
Top Layer:
  rectangle: 1276,1421 1289,1442.69
  region: 1382,1316 1386.97,1320.97 1396.04,1320.97 1409.9,1334.83 1409.9,1379.9 1431,1401 ccw(c1424.86,1401) 1424.86,1407.14 1379,1407.14 1379,1318
  lines w5: 1333,1461 1362.2,1461

## Other copper
Top Layer:
  text "Isolation CAN Module / Rev4 / Design By : / MosesChan / Date : 2024-04-1" at 2364,1598 h30 r270
  text "GND" at 150,610 h40
  text "CAN_L" at 1920,230 h40 r270
  text "POWER +" at 325,175 h40
  text "CAN_H" at 2440,30 h40 r90
Bottom Layer:
  rectangle net EN: 798,55 892.93,229

## Silkscreen, mask and mechanical layers (free items; w line width, h text height)
Top Overlay:
  text "MCU_CAN_RX" at 330,1400 h40
  text "MCU_CAN_TX" at 330,1160 h40
  text "IN : 4.5V - 17V / OUT : 5V" at 1180,1145 h40 r270
  text "PWR_EN" at 828,499 h40 r270
Bottom Overlay:
  text "JLCJLCJLCJLC" at 2573,152 h40 r270
Top Solder:
  the board outline again, w47.24
  text "CAN_L" at 1920,230 h40 r270
  text "CAN_H" at 2440,30 h40 r90
Mechanical 1:
  the board outline again, w47.24

## Text inside footprints (layer, text, board x,y; h text height)
H1: Top Overlay "1" at 265,255 h30 r90
H2: Top Overlay "1" at 250,1240 h30 r90
H3: Top Overlay "1" at 2120,260 h30 r180
U1: Top Overlay "+Vo" at 1683.07,224.8 h30; Top Overlay "0V" at 1484.99,222.01 h30; Top Overlay "GND" at 1174.98,220.57 h30; Top Overlay "Vin" at 1083.84,219.14 h30; Top Overlay "F_S-1WR3" at 1430,130 h30